# EAGLE board PCB_GW-ERP2U700_2021-09-18.PCB (EAGLE 9.6.2)
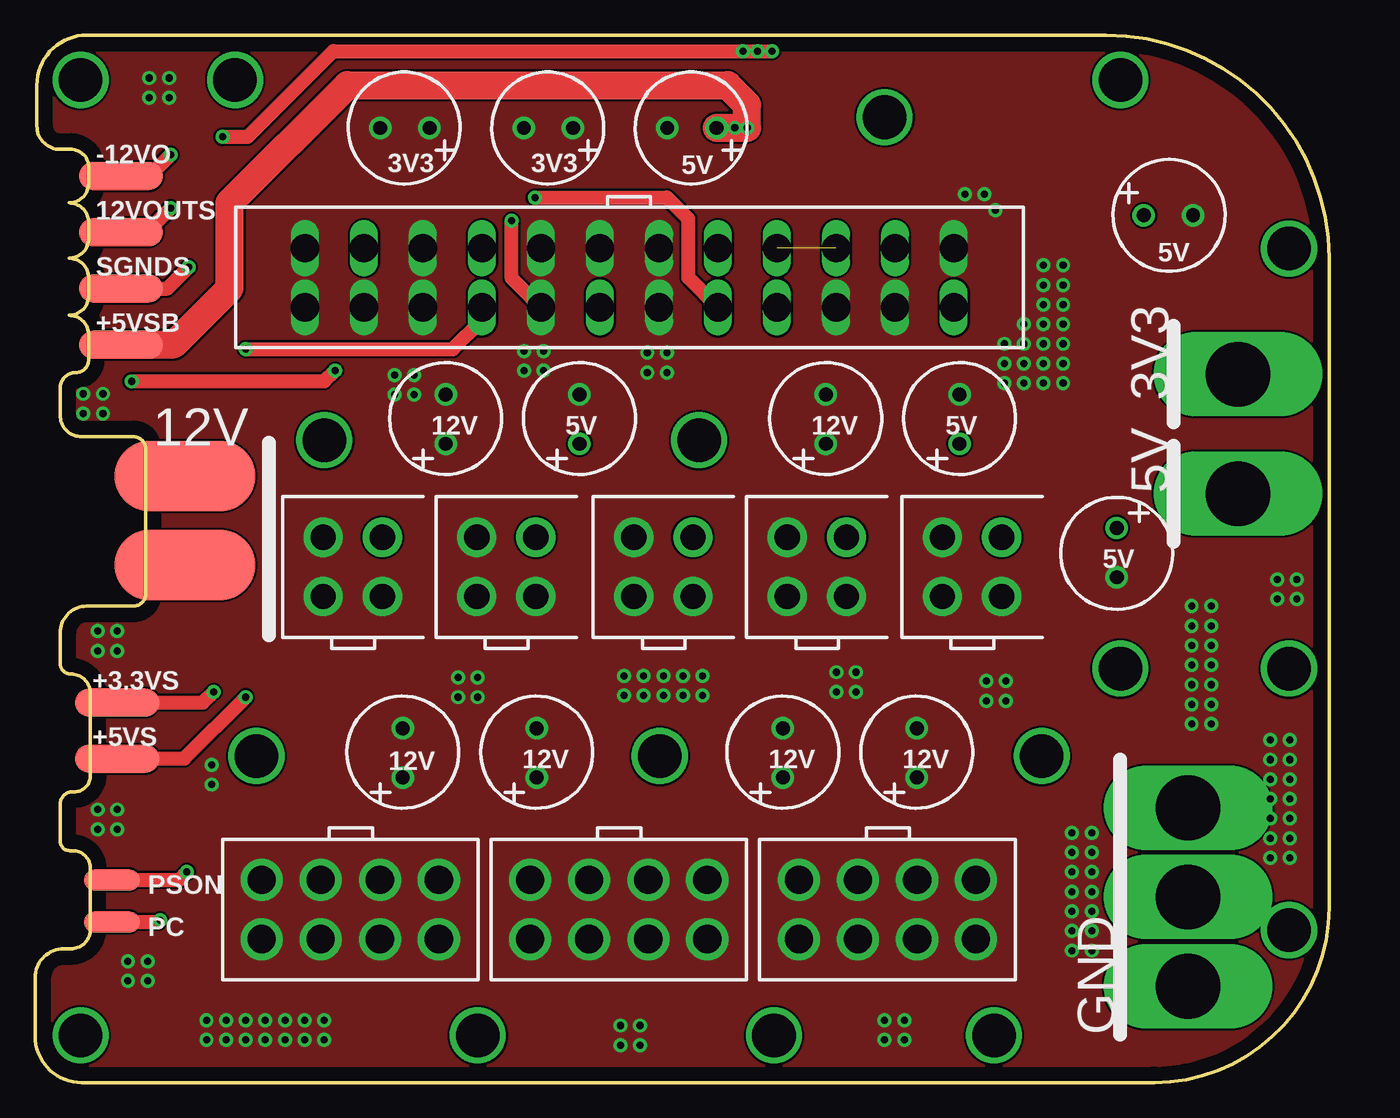
[diagram p0: board, top side]
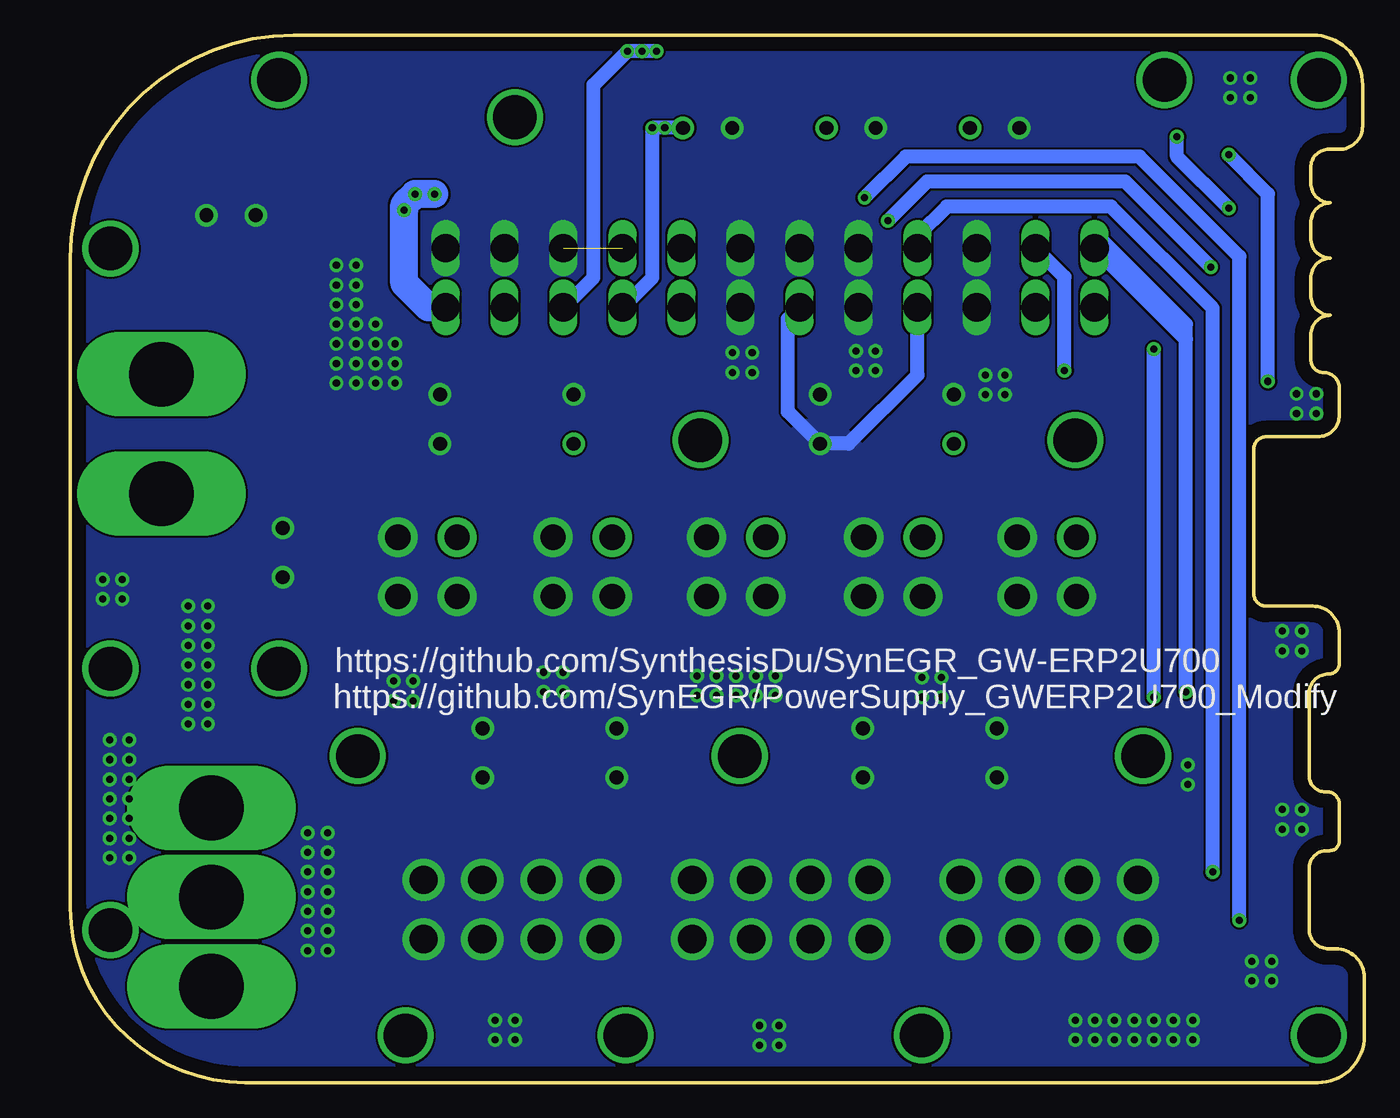
[diagram p1: board, bottom side, seen from below]

Size 92.07 x 74.55 mm. Coordinates in mm from the lower left corner, seen from the top.
Outline: 3.3,45.97 arc-90 1.78,47.5 1.78,49.4 arc-90 2.92,50.55 arc90 3.81,51.44 3.81,53.21 arc90 2.41,54.61 arc90 3.81,56.01 3.81,57.28 arc90 2.41,58.67 arc90 3.81,60.07 3.81,61.21 arc90 2.41,62.61 arc90 3.81,64.01 3.81,65.15 arc90 2.54,66.42 1.78,66.42 arc-90 0.13,68.07 0.13,70.99 arc-90 3.68,74.55 76.2,74.55 arc-90 92.07,58.67 92.07,12.45 arc-90 79.63,0 3.3,0 arc-90 0,3.3 0,7.26
Outline: 3.18,45.97 6.99,45.97 arc-90 7.87,45.08 7.87,34.8 arc-90 6.99,33.91 3.68,33.91 arc90 1.78,32 1.78,29.84 arc90 2.54,29.08 arc-90 3.94,27.69 3.94,21.84 arc-90 2.79,20.7 2.67,20.7 arc90 1.78,19.81 1.78,17.2 arc90 2.46,16.51 2.67,16.51 arc-90 3.94,15.24 3.94,10.92 arc-90 2.54,9.52 2.03,9.52 arc90 0,7.49 0,7.29
Copper layers (1*16): Top 0.035mm / dielectric 1.5mm / Bottom 0.035mm
Design rules "PCB_GW-ERP2U700_2021-09-18": minimum track width 6mil, minimum drill 0.35mm, track to track 6mil, track to pad 6mil, pad to pad 6mil, via to via 6mil, smd to smd 6mil, copper to edge 40mil, drill to drill 6mil, minimum pad ring 0mil, minimum via ring 0mil, stop-mask expansion 4mil, vias tented up to drill 0mil, thermal gap 10mil

## Footprints (pad centres in the part's own frame; a part is rotated, then mirrored left to right if it is on the bottom)
CAP-TH_BD8.0-P3.50-D0.6-FD_1PRIMARY = drill 0.991 pad 1.6: 1 -1.753,0; 2 1.753,0
CONN-TH_HAA420A-8A_1PRIMARY = drill 2.007 pad 2.997: 1 -6.299,-2.108; 2 -6.299,2.108; 3 -2.108,-2.108; 4 -2.108,2.108; 5 2.108,-2.108; 6 2.108,2.108; 7 6.299,-2.108; 8 6.299,2.108
CONN-TH_HAA420A-4A_1PRIMARY = drill 1.803 pad 2.794: 1 -2.108,-2.108; 2 -2.108,2.108; 3 2.108,-2.108; 4 2.108,2.108
P:EX157Y157D1221 = drill 3.099 pad 3.988: 1 0,0
P:EX276Y236D1811 = drill 4.597 pad 5.994 long: 1 0,0
EF236X79TOP1 = smd 5.994 x 2.007: 0 0,0
EF157X59TOP1 = smd 3.988 x 1.499: 0 0,0
EF394X197TOP1 = smd 10.008 x 5.004: 0 0,0
CONN-TH_4.2-2X12A_1PRIMARY = drill 2.007 pad 2.007 long: 1 -23.089,-2.108; 2 -23.089,2.108; 3 -18.898,-2.108; 4 -18.898,2.108; 5 -14.707,-2.108; 6 -14.707,2.108; 7 -10.49,-2.108; 8 -10.49,2.108; 9 -6.299,-2.108; 10 -6.299,2.108; 11 -2.108,-2.108; 12 -2.108,2.108; 13 2.108,-2.108; 14 2.108,2.108; 15 6.299,-2.108; 16 6.299,2.108; 17 10.49,-2.108; 18 10.49,2.108; 19 14.707,-2.108; 20 14.707,2.108; 21 18.898,-2.108; 22 18.898,2.108; 23 23.089,-2.108; 24 23.089,2.108

## Placement (x,y rotation side)
C3  CAP-TH_BD8.0-P3.50-D0.6-FD  [CAP-TH_BD8.0-P3.50-D0.6-FD_1PRIMARY]  46.74,67.94 180 top
C6  CAP-TH_BD8.0-P3.50-D0.6-FD  [CAP-TH_BD8.0-P3.50-D0.6-FD_1PRIMARY]  38.74,47.22 90 top
C7  CAP-TH_BD8.0-P3.50-D0.6-FD  [CAP-TH_BD8.0-P3.50-D0.6-FD_1PRIMARY]  29.21,47.22 90 top
C8  CAP-TH_BD8.0-P3.50-D0.6-FD  [CAP-TH_BD8.0-P3.50-D0.6-FD_1PRIMARY]  56.26,47.22 90 top
C9  CAP-TH_BD8.0-P3.50-D0.6-FD  [CAP-TH_BD8.0-P3.50-D0.6-FD_1PRIMARY]  65.79,47.22 90 top
C10  CAP-TH_BD8.0-P3.50-D0.6-FD  [CAP-TH_BD8.0-P3.50-D0.6-FD_1PRIMARY]  26.16,23.47 90 top
C11  CAP-TH_BD8.0-P3.50-D0.6-FD  [CAP-TH_BD8.0-P3.50-D0.6-FD_1PRIMARY]  35.69,23.47 90 top
C12  CAP-TH_BD8.0-P3.50-D0.6-FD  [CAP-TH_BD8.0-P3.50-D0.6-FD_1PRIMARY]  53.21,23.47 90 top
C13  CAP-TH_BD8.0-P3.50-D0.6-FD  [CAP-TH_BD8.0-P3.50-D0.6-FD_1PRIMARY]  62.74,23.47 90 top
C14  CAP-TH_BD8.0-P3.50-D0.6-FD  [CAP-TH_BD8.0-P3.50-D0.6-FD_1PRIMARY]  26.31,67.94 180 top
C15  CAP-TH_BD8.0-P3.50-D0.6-FD  [CAP-TH_BD8.0-P3.50-D0.6-FD_1PRIMARY]  36.53,67.94 180 top
C19  CAP-TH_BD8.0-P3.50-D0.6-FD  [CAP-TH_BD8.0-P3.50-D0.6-FD_1PRIMARY]  76.96,37.72 270 top
C20  CAP-TH_BD8.0-P3.50-D0.6-FD  [CAP-TH_BD8.0-P3.50-D0.6-FD_1PRIMARY]  80.65,61.72 0 top
CN1  CONN-TH_HAA420A-8A  [CONN-TH_HAA420A-8A_1PRIMARY]  22.43,12.32 0 top
CN2  CONN-TH_HAA420A-8A  [CONN-TH_HAA420A-8A_1PRIMARY]  41.53,12.32 0 top
CN3  CONN-TH_HAA420A-4A  [CONN-TH_HAA420A-4A_1PRIMARY]  22.61,36.7 180 top
CN4  CONN-TH_HAA420A-8A  [CONN-TH_HAA420A-8A_1PRIMARY]  60.66,12.32 0 top
CN5  CONN-TH_HAA420A-4A  [CONN-TH_HAA420A-4A_1PRIMARY]  33.53,36.7 180 top
CN6  CONN-TH_HAA420A-4A  [CONN-TH_HAA420A-4A_1PRIMARY]  44.7,36.7 180 top
CN7  CONN-TH_HAA420A-4A  [CONN-TH_HAA420A-4A_1PRIMARY]  55.63,36.7 180 top
CN8  CONN-TH_HAA420A-4A  [CONN-TH_HAA420A-4A_1PRIMARY]  66.68,36.7 180 top
DUMMY1  [P:EX157Y157D1221]  3.23,3.36 0 top
DUMMY2  [P:EX157Y157D1221]  3.23,71.36 0 top
DUMMY3  [P:EX157Y157D1221]  14.23,71.36 0 top
DUMMY4  [P:EX157Y157D1221]  77.23,71.36 0 top
DUMMY5  [P:EX157Y157D1221]  68.23,3.36 0 top
DUMMY6  [P:EX157Y157D1221]  89.23,10.86 0 top
DUMMY7  [P:EX157Y157D1221]  89.23,59.36 0 top
DUMMY8  [P:EX157Y157D1221]  20.57,45.72 0 top
DUMMY9  [P:EX157Y157D1221]  47.24,45.72 0 top
DUMMY10  [P:EX276Y236D1811]  85.6,50.42 0 top
DUMMY11  [P:EX276Y236D1811]  82.04,19.56 0 top
DUMMY12  [P:EX276Y236D1811]  82.04,13.21 0 top
DUMMY13  [P:EX276Y236D1811]  82.04,6.86 0 top
DUMMY14  [P:EX276Y236D1811]  85.6,41.91 0 top
DUMMY15  [P:EX157Y157D1221]  31.5,3.36 0 top
DUMMY16  [P:EX157Y157D1221]  52.58,3.36 0 top
DUMMY17  [P:EX157Y157D1221]  44.45,23.24 0 top
DUMMY18  [P:EX157Y157D1221]  15.75,23.24 0 top
DUMMY19  [P:EX157Y157D1221]  71.63,23.24 0 top
DUMMY20  [P:EX157Y157D1221]  77.23,29.46 0 top
DUMMY21  [P:EX157Y157D1221]  89.23,29.46 0 top
DUMMY22  [P:EX157Y157D1221]  60.45,68.71 0 top
DUMMY23  [EF236X79TOP1]  6.1,64.52 0 top
DUMMY24  [EF157X59TOP1]  5.46,11.43 0 top
DUMMY25  [EF157X59TOP1]  5.46,14.43 0 top
DUMMY26  [EF394X197TOP1]  10.67,43.18 0 top
DUMMY27  [EF394X197TOP1]  10.67,36.83 0 top
DUMMY28  [EF236X79TOP1]  6.1,52.52 0 top
DUMMY29  [EF236X79TOP1]  6.1,56.52 0 top
DUMMY30  [EF236X79TOP1]  6.1,60.52 0 top
DUMMY31  [EF236X79TOP1]  5.84,27.05 0 top
DUMMY32  [EF236X79TOP1]  5.84,23.05 0 top
IMPORTED_IMAGE  Comment  [IMPORTED_IMAGE_1PRIMARY]  69.29,48.39 0 top
IMPORTED_IMAGE2  Comment  [IMPORTED_IMAGE_1PRIMARY]  69.37,59.79 0 top
IMPORTED_IMAGE3  Comment  [IMPORTED_IMAGE_1PRIMARY]  70.31,68.88 0 top
IMPORTED_IMAGE4  Comment  [IMPORTED_IMAGE_2PRIMARY]  63.37,74.27 0 top
P1  CONN-TH_4.2-2X12A  [CONN-TH_4.2-2X12A_1PRIMARY]  42.29,57.28 0 top

## Library data of the parts
C3 C6-C15 C19 C20 CN1-CN8 DUMMY1-DUMMY32 IMPORTED_IMAGE IMPORTED_IMAGE2-IMPORTED_IMAGE4 P1 = PCB_GW-ERP2U700_2021-09-18

## Nets
+3.3V: C14.1 C15.1 P1.1 P1.2 P1.3 P1.23
+5V: C6.1 C9.1 C19.1 C20.1 CN3.1 CN5.1 CN6.1 CN7.1 CN8.1 P1.7 P1.11 P1.18 P1.20 P1.22
+5VSB: C3.1 P1.17
+12V: C7.1 C8.1 C10.1 C11.1 C12.1 C13.1 CN1.2 CN1.4 CN1.6 CN1.8 CN2.2 CN2.4 CN2.6 CN2.8 CN3.3 CN4.2 CN4.4 CN4.6 CN4.8 CN5.3 CN6.3 CN7.3 CN8.3 P1.19 P1.21
-12VO: P1.4
NC: P1.16
PC: P1.15
PSON: P1.8
SGND: C3.2 C6.2 C7.2 C8.2 C9.2 C10.2 C11.2 C12.2 C13.2 C14.2 C15.2 C19.2 C20.2 CN1.1 CN1.3 CN1.5 CN1.7 CN2.1 CN2.3 CN2.5 CN2.7 CN3.2 CN3.4 CN4.1 CN4.3 CN4.5 CN4.7 CN5.2 CN5.4 CN6.2 CN6.4 CN7.2 CN7.4 CN8.2 CN8.4 P1.5 P1.6 P1.9 P1.10 P1.12 P1.13 P1.14 P1.24

## Tracks (layer width: path | path; a pad name or v marks a point on that pad's centre or on a via)
+3.3V  (via drill 0.5 pad 0.99)
  Bottom 1: 12.7,27.81 12.7,52.88 | 12.7,52.88 12.7,53.97 18.92,60.2 19.2,60.2 P1.2 12.7,52.88
  Bottom 2: P1.23 66.6,55.17 68.33,56.9 v68.33,62.1 68.33,62.48 v67.56,63.25 v66.17,63.25
  pour Top (no thermals): 14.99,52.2 13.72,53.47 13.72,57.78 13.72,62.48 22.23,70.99 43.43,70.99 48.26,75.82 85.72,75.82 96.14,65.41 96.14,48.01 93.73,45.59 83.95,45.59 79.25,50.29 79.25,54.86 77.47,56.64 73.15,60.96 55.5,60.96 26.29,60.96 25.78,60.45 25.78,52.58 25.53,52.32
+3.3VS  (via drill 0.5 pad 0.99)
  Top 1: 5.84,27.05 11.94,27.05 v12.7,27.81
+5V  (1 unrouted)
  Bottom 1: P1.7 31.8,50.37 36.7,45.47 C6.1 41.02,47.75 41.02,54.36 P1.11
  pour Bottom (no thermals): 56.39,57.21 63.5,57.21 63.5,61.66 56.39,61.66
  pour Bottom (no thermals): 55.94,58.55 57.34,58.55 57.34,62.36 55.94,62.36
  pour Bottom (no thermals): 24.38,36.7 23.88,36.7 22.61,37.97 22.61,40 23.49,40.89 26.16,43.56 29.34,43.56 33.91,43.56 37.47,47.12 40.13,47.12 43.69,43.56 60.58,43.56 64.13,47.12 87.38,47.12 88.52,45.97 88.52,38.35 86.87,36.7
  pour Bottom (no thermals): 55.5,56.64 54.86,57.28 54.86,64.77 54.86,71.63 56.01,72.77 76.71,72.77 80.39,69.09 80.39,45.21 80.52,45.08 75.31,45.08 75.18,45.21 75.18,62.99 73.03,65.15 65.91,65.15 63.88,63.12 63.88,57.28 63.37,56.77 56.13,56.77 55.88,56.52
+5VS  (via drill 0.5 pad 0.99)
  Top 1: v14.99,52.2 29.72,52.2 31.8,54.28 31.8,55.17 | 5.84,23.06 10.62,23.06 v14.99,27.43
  Bottom 1: v14.99,27.43 v14.99,52.2
+5VSB  (via drill 0.5 pad 0.99)
  Top 2: 6.1,52.53 9.86,52.53 13.84,56.52 13.84,62.61 22.23,70.99 49.28,70.99 50.67,69.6 v50.67,67.94 v49.78,67.94 C3.1
  Bottom 1: P1.17 50.67,57.3 v50.67,67.94 v49.78,67.94 C3.1
+12V  (via drill 0.5 pad 0.99)
  Top 1: v52.45,73.41 v51.41,73.41 v50.37,73.41 21.21,73.41 15.11,67.31 v13.34,67.31 | 6.1,60.53 7.95,60.53 v9.65,62.23
  Bottom 1: P1.19 54.86,57.3 54.86,70.99 v52.45,73.41 v50.37,73.41 | v13.34,67.31 13.34,65.91 v9.65,62.23
  pour Top (no thermals): 6.86,45.72 9.27,48.13 24.26,48.13 25.02,47.37 42.29,47.37 43.05,48.13 47.12,48.13 51.31,48.13 52.2,47.24 60.07,47.24 66.68,40.64 66.68,37.34 66.04,36.7 19.56,36.7 18.41,35.56 18.41,33.4 19.56,32.26 29.21,22.86 38.99,22.86 41.66,20.19 47.63,20.19 50.42,22.99 63.88,22.99 69.22,17.65 69.22,13.59 67.94,12.32 15.24,12.32 13.34,14.22 13.34,17.65 14.99,19.3 17.27,19.3 18.41,20.45 18.41,25.53 15.11,28.83 11.3,28.83 7.24,32.89 7.24,34.29 4.06,36.07 4.06,43.43 4.45,43.81
  pour Top (no thermals): 44.96,47.88 54.36,57.28 57.66,57.28 62.36,57.28 63.37,56.26 66.68,52.96 66.68,40.13
  pour Bottom (no thermals): 68.71,11.81 71.37,14.48 71.37,14.61 71.37,18.54 65.53,24.38 20.07,24.38 19.69,24 15.75,20.07 12.45,20.07 10.67,20.07 9.78,19.18 9.78,12.19 11.3,10.67
-12VO  (via drill 0.5 pad 0.99)
  Top 1: 6.1,64.52 8.13,64.52 v9.65,66.04 | v21.34,50.67 20.57,49.91 v6.86,49.91
  Bottom 1: v9.65,66.04 6.86,63.25 v6.86,49.91 | P1.4 21.34,57.33 v21.34,50.67
PC  (via drill 0.5 pad 0.99)
  Top 1: v35.56,62.99 44.96,62.99 46.48,61.47 46.48,57.28 P1.15 | v8.89,11.56 8.76,11.43 5.46,11.43
  Bottom 1: v8.89,11.56 8.89,58.8 16,65.91 32.64,65.91 v35.56,62.99
PSON  (via drill 0.5 pad 0.99)
  Top 1: 5.46,14.43 10.24,14.43 v10.8,14.99
  Bottom 1: v10.8,14.99 10.8,55.12 18.03,62.36 29.72,62.36 31.8,60.27 P1.8
S$1
  pour Top (no thermals): 52.83,57.66 61.21,57.66 61.21,61.09 52.83,61.09
SGND  (via drill 0.5 pad 0.99)
  other vias: 8.13,71.5 8.13,70.1 9.53,71.5 9.53,70.1 5.84,30.73 4.45,30.73 5.84,32.13 4.45,32.13 5.84,18.03 4.45,18.03 5.84,19.43 4.45,19.43 12.57,21.21 12.57,22.61 3.43,49.02 3.43,47.62 4.83,49.02 4.83,47.62 34.8,52.07 34.8,50.67 36.2,52.07 36.2,50.67 43.56,51.94 43.56,50.55 44.96,51.94 44.96,50.55 71.75,51.18 71.75,49.78 73.15,51.18 73.15,49.78 71.75,52.58 73.15,52.58 71.75,53.97 73.15,53.97 71.75,55.37 73.15,55.37 71.75,56.77 73.15,56.77 71.75,58.17 73.15,58.17 70.36,51.18 70.36,49.78 70.36,52.58 70.36,53.97 68.96,51.18 68.96,49.78 68.96,52.58 82.3,26.92 82.3,25.53 83.69,26.92 83.69,25.53 82.3,28.32 83.69,28.32 82.3,29.72 83.69,29.72 82.3,31.11 83.69,31.11 82.3,32.51 83.69,32.51 82.3,33.91 83.69,33.91 87.88,17.4 87.88,16 89.28,17.4 89.28,16 87.88,18.8 89.28,18.8 87.88,20.19 89.28,20.19 87.88,21.59 89.28,21.59 87.88,22.99 89.28,22.99 87.88,24.38 89.28,24.38 73.79,10.79 73.79,9.4 75.18,10.79 75.18,9.4 73.79,12.19 75.18,12.19 73.79,13.59 75.18,13.59 73.79,14.99 75.18,14.99 73.79,16.38 75.18,16.38 73.79,17.78 75.18,17.78 19.18,3.05 20.57,3.05 19.18,4.45 20.57,4.45 17.78,3.05 17.78,4.45 16.38,3.05 16.38,4.45 14.99,3.05 14.99,4.45 13.59,3.05 13.59,4.45 12.19,3.05 12.19,4.45 47.5,27.56 47.5,28.96 46.1,27.56 46.1,28.96 44.7,27.56 44.7,28.96 43.31,27.56 43.31,28.96 41.91,27.56 41.91,28.96 69.09,27.18 69.09,28.58 67.69,27.18 67.69,28.58 89.79,34.42 89.79,35.81 88.39,34.42 88.39,35.81 43.05,2.67 43.05,4.06 41.66,2.67 41.66,4.06 61.85,3.05 61.85,4.45 60.45,3.05 60.45,4.45 58.42,27.81 58.42,29.21 57.02,27.81 57.02,29.21 31.5,27.43 31.5,28.83 30.1,27.43 30.1,28.83 8,7.24 8,8.64 6.6,7.24 6.6,8.64 26.97,48.97 25.58,48.97 25.58,50.37 26.97,50.37
  pour Top (no thermals): -5.33,82.93 -2.79,80.39 102.62,80.39 108.84,74.17 108.84,-11.43 106.68,-9.27 -13.21,-9.27 -10.67,-6.73 -10.67,-1.02
  pour Bottom (no thermals): -15.11,73.28 -0.13,88.26 6.1,88.26 90.04,88.26 101.85,76.45 101.85,3.3 84.58,-13.97 -4.83,-13.97 -11.05,-7.75
SGNDS  (via drill 0.5 pad 0.99)
  Top 1: v33.91,61.34 33.91,57.25 35.99,55.17 | 6.1,56.52 9.4,56.52 v10.92,58.04
  Bottom 1: v10.92,58.04 17.02,64.13 31.12,64.13 v33.91,61.34

## Text on the board
tPlace: -12VO | 3V3 | 3V3 | 5V | 12VOUTS | 5V | SGNDS | +5VSB | 3V3 | 12V | 5V | 12V | 5V | 12V | 5V | 5V | +3.3VS | +5VS | 12V | 12V | 12V | 12V | PSON | PC | GND
bPlace: https://github.com/SynthesisDu/SynEGR_GW-ERP2U700 | https://github.com/SynEGR/PowerSupply_GWERP2U700_Modify